# Altium PCB 下.PCBDOC
Units mm, origin at the board's own origin, x right, y up, seen from the top; angles counter-clockwise.
Board outline 146 x 45 mm, 2 copper layers (Top Layer, Bottom Layer); 4 components, 41 nets, 122 pads, 0 vias.
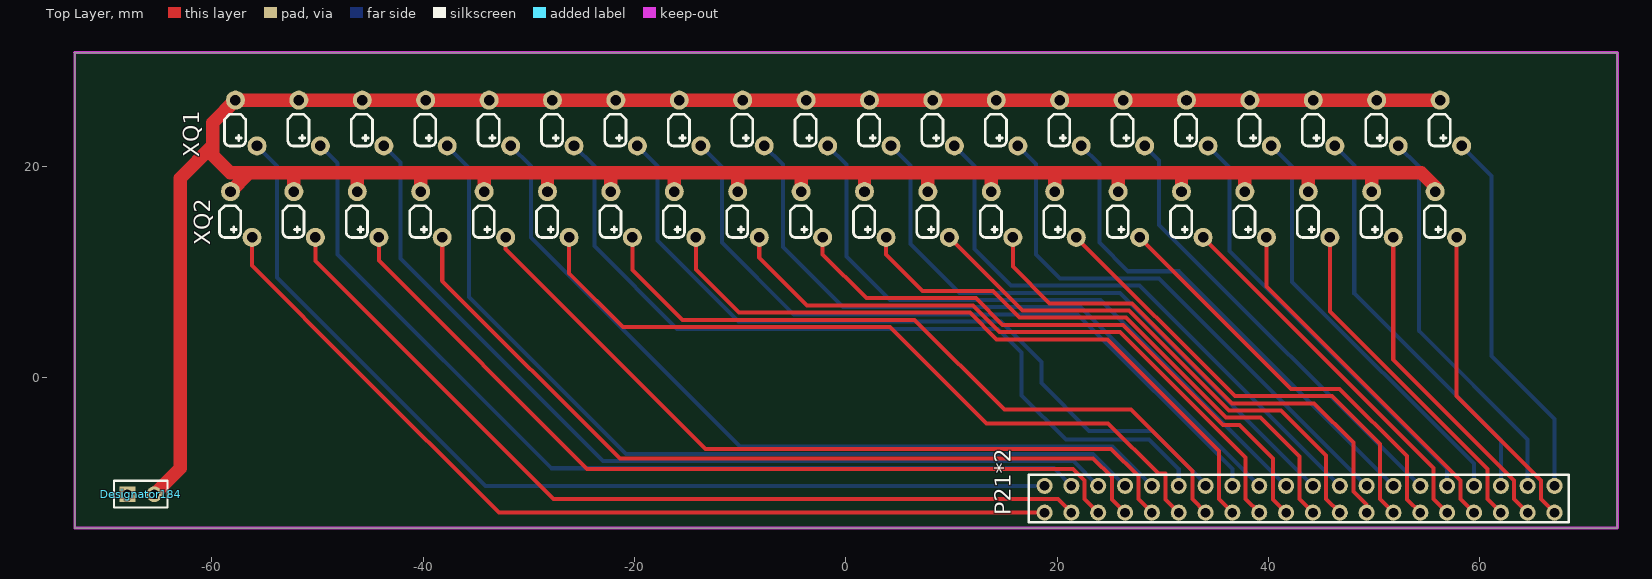
[diagram p0: Top Layer view]
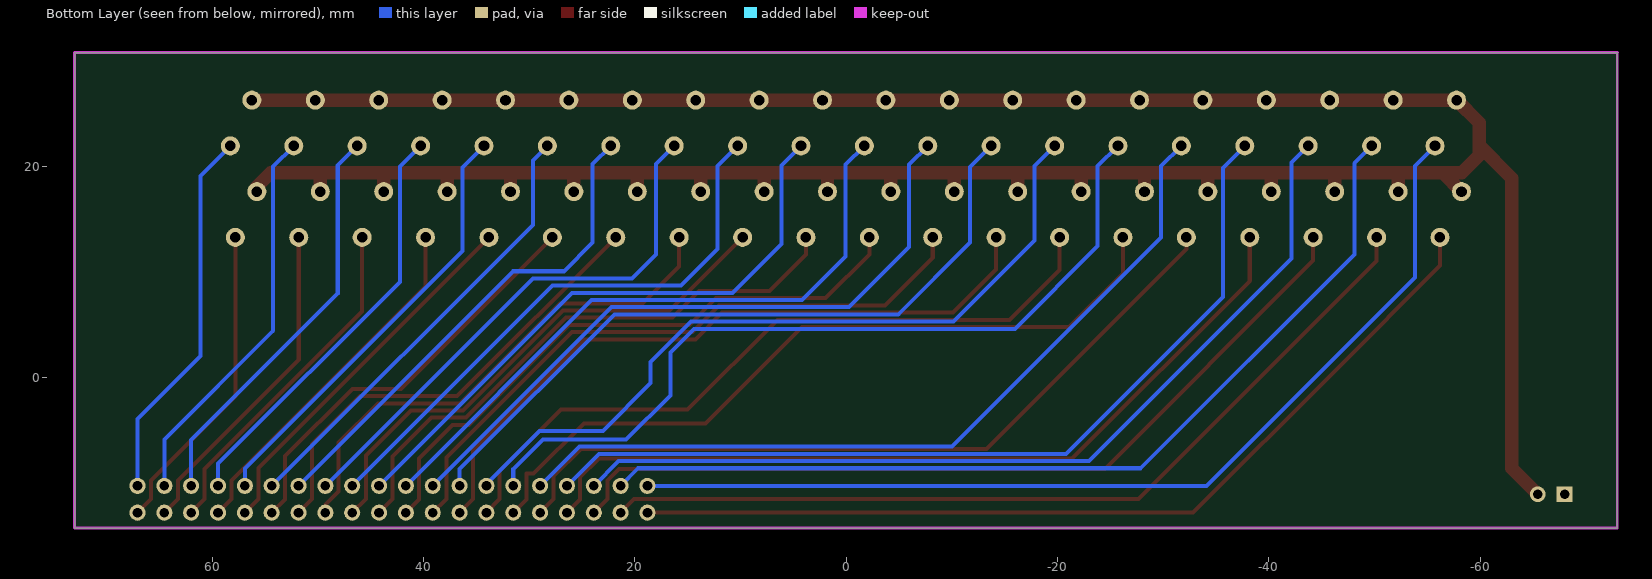
[diagram p1: Bottom Layer view, seen from below]

## Layer stack, top to bottom
Top Layer: signal copper 0.0356
Dielectric: dielectric 0.32, FR-4, Dk 4.8
Bottom Layer: signal copper 0.0356

## Board outline
-72.979,-14.2 73.022,-14.2 73.022,30.8 -72.978,30.8 -72.979,30.799

## Design rules (kind name [scope] priority, off if disabled: settings)
Clearance [All] p1: gap=0.3
FabricationTestPointUsage TestPointUsage [All] p1: valid=0 allowmultiple=FALSE
FabricationTestpoint Testpoint [All] p1: side=3 testpointundercomponent=TRUE minsize=1.016 maxsize=2.54 preferedsize=1.524 minholesize=0 maxholesize=1.016 preferedholesize=0.813 testpointgrid=0.025 allowsidetop=TRUE allowsidebottom=TRUE usegrid=TRUE gridtolerance=0
PolygonConnect [All] p1: connectstyle=Relief reliefconductorwidth=0.254 reliefentries=4 polygonreliefangle="90 Angle" airgapwidth=0.254
RoutingVias [All] p1: holewidth=0.8 width=1.6 viastyle="Through Hole" minholewidth=0.711 minwidth=1.27 maxholewidth=0.711 maxwidth=1.27
SilkToSolderMaskClearance SilkscreenOverComponentPads [IsPad] p1: minsilkscreentomaskgap=0.254 clearancetoexposedcopper=TRUE
SolderMaskExpansion [All] p1: expansion=0.102
Width Width_1 [All] p1: maxlimit=1.27 minlimit=0.254 preferedwidth=0.381 minimp=50.000000 maximp=50.000000 favimp=50.000000
Width [InNet('GND')] p2: maxlimit=1.27 minlimit=0.254 preferedwidth=0.381
25 further rules are at their usual default settings.

## Components (designator, comment, footprint, x,y, rotation, side; value= is the part's Value field where it differs from the comment)
Designator184 "" HDR1X2 -68,-11 r0 top
P21*2 "Header 21X2" XinPian 18.8,-12.751 r180 top
XQ1 "Header 20X2" XIANQUAN1 58.272,21.96 r180 top
XQ2 "Header 20X2" XIANQUAN1 57.8,13.3 r180 top

## Footprints (in the part's own frame and the unit in brackets; to place one, negate y for a bottom-side part, rotate by r counter-clockwise, add the part's x,y. Pads: shape width x height; smd on the part's side, far side on the other; paste and mask are expansions set on the pad)
HDR1X2 [mm] "Connector; Header; 2 Position"
  rect 1.5x1.5 hole 0.9: 1(0,0)
  round 1.5 hole 0.9: 2(2.54,0)
  silkscreen extent -1.27,-1.27 3.81,1.27
XIANQUAN1 [mm]
  round 1.8 hole 1: 1(2.04,-4.34) 2(0,0) 3(8.04,-4.34) 4(6,0) 5(14.04,-4.34) 6(12,0) 7(20.04,-4.34) 8(18,0) 9(26.04,-4.34) 10(24,0) 11(32.04,-4.34) 12(30,0) 13(38.04,-4.34) 14(36,0) 15(44.04,-4.34) 16(42,0) 17(50.04,-4.34) 18(48,0) 19(56.04,-4.34) 20(54,0) 21(62.04,-4.34) 22(60,0) 23(68.04,-4.34) 24(66,0) 25(74.04,-4.34) 26(72,0) 27(80.04,-4.34) 28(78,0) 29(86.04,-4.34) 30(84,0) 31(92.04,-4.34) 32(90,0) 33(98.04,-4.34) 34(96,0) 35(104.04,-4.34) 36(102,0) 37(110.04,-4.34) 38(108,0) 39(116.04,-4.34) 40(114,0)
  silkscreen extent 1.08,-3 117.08,0
XinPian [mil]
  round 60 hole 36: 1(0,-100) 2(-100,-100) 3(-200,-100) 4(-300,-100) 5(-400,-100) 6(-500,-100) 7(-600,-100) 8(-700,-100) 9(-800,-100) 10(-900,-100) 11(-1000,-100) 12(-1100,-100) 13(-1200,-100) 14(-1300,-100) 15(-1400,-100) 16(-1500,-100) 17(-1600,-100) 18(-1700,-100) 19(-1800,-100) 20(-1900,-100) 21(-1900,0) 22(-1800,0) 23(-1700,0) 24(-1600,0) 25(-1500,0) 26(-1400,0) 27(-1300,0) 28(-1200,0) 29(-1100,0) 30(-1000,0) 31(-900,0) 32(-800,0) 33(-700,0) 34(-600,0) 35(-500,0) 36(-400,0) 37(-300,0) 38(-200,0) 39(-100,0) 40(0,0)
  silkscreen extent -1953,-142 59,35

## Part data
P21*2: library part "Header 22X2", "Header, 22-Pin, Dual row"
XQ1 XQ2: "Header, 20-Pin, Dual row"

## Nets (pads, with @x,y where several pads share a name; then routed paths per layer and width w, separated by ;. In a path a pad name is that pad's centre, name@x,y a point inside that pad or via, vN(x,y) a via of type N, cw(c..) or ccw(c..) an arc to the next point about the centre after c; other vN are vias at no path point)
GND: Designator184.2 XQ1.1 XQ1.3 XQ1.5 XQ1.7 XQ1.9 XQ1.11 XQ1.13 XQ1.15 XQ1.17 XQ1.19 XQ1.21 XQ1.23 XQ1.25 XQ1.27 XQ1.29 XQ1.31 XQ1.33 XQ1.35 XQ1.37 XQ1.39 XQ2.1 XQ2.3 XQ2.5 XQ2.7 XQ2.9 XQ2.11 XQ2.13 XQ2.15 XQ2.17 XQ2.19 XQ2.21 XQ2.23 XQ2.25 XQ2.27 XQ2.29 XQ2.31 XQ2.33 XQ2.35 XQ2.37 XQ2.39 | length 307.8
  Top Layer w1.27: Designator184.2 -63,-8.54 -63,18.91 -59.91,22 ; XQ2.39 -56.47,19.41 ; XQ2.37 -52.24,19.37 -52.2,19.41 ; XQ2.35 -46.24,19.35 -46.18,19.41 ; XQ2.33 -40.24,19.32 -40.15,19.41 ; XQ2.31 -34.24,19.37 -34.2,19.41 ; XQ2.29 -28.24,19.35 -28.18,19.41 ; XQ2.27 -22.24,19.22 -22.05,19.41 ; XQ2.25 -16.24,19.25 -16.08,19.41 ; XQ2.23 -10.24,19.41 ; XQ2.21 -4.24,19.4 ; XQ2.19 1.76,19.4 ; XQ2.17 7.76,19.27 7.9,19.41 ; XQ2.15 13.76,19.35 13.82,19.41 ; XQ2.13 19.76,19.22 19.95,19.41 ; XQ2.11 25.76,19.32 25.85,19.41 ; XQ2.9 31.76,19.17 32,19.41 ; XQ2.7 37.76,19.27 37.9,19.41 ; XQ2.5 43.76,19.37 43.8,19.41 ; XQ2.3 49.76,19.4 49.77,19.41 ; XQ2.1 55.76,18.09 54.44,19.41 -58.25,19.41 -59.91,21.07 -59.91,22 ; XQ1.1 XQ1.15 XQ1.23 XQ1.39 -59.91,24.159 -59.91,22
XQ1_1: P21*2.20 XQ1.2 | length 35.8
  Bottom Layer w0.381: XQ1.2 61.11,19.121 61.11,10.91 61.11,2.088 67.06,-3.861 P21*2.20
XQ1_2: P21*2.19 XQ1.4 | length 37.2
  Bottom Layer w0.381: XQ1.4 54.23,20.001 54.23,4.468 64.52,-5.821 P21*2.19
XQ1_3: P21*2.18 XQ1.6 | length 38.7
  Bottom Layer w0.381: XQ1.6 48.11,20.121 48.11,7.988 61.98,-5.881 P21*2.18
XQ1_4: P21*2.17 XQ1.8 | length 40.1
  Bottom Layer w0.381: XQ1.8 42.23,20.001 42.23,9.099 59.44,-8.111 P21*2.17
XQ1_5: P21*2.16 XQ1.10 | length 41.5
  Bottom Layer w0.381: XQ1.10 36.32,19.911 36.32,11.999 56.9,-8.581 P21*2.16
XQ1_6: P21*2.15 XQ1.12 | length 43
  Bottom Layer w0.381: XQ1.12 29.65,20.581 29.65,14.498 P21*2.15
XQ1_7: P21*2.14 XQ1.14 | length 49.2
  Bottom Layer w0.381: XQ1.14 23.98,20.251 23.98,15.699 ; 23.98,13.7 23.98,15.699 ; P21*2.14 31.51,10.099 26.7,10.099 23.98,12.818 23.98,15.699
XQ1_8: P21*2.13 XQ1.16 | length 51.3
  Bottom Layer w0.381: XQ1.16 18,20.231 18,11.698 20.281,9.418 29.651,9.418 P21*2.13
XQ1_9: P21*2.12 XQ1.18 | length 54.4
  Bottom Layer w0.381: XQ1.18 12.17,20.061 12.17,12.199 15.632,8.737 27.792,8.737 P21*2.12
XQ1_10: P21*2.11 XQ1.20 | length 57.6
  Bottom Layer w0.381: XQ1.20 6.12,20.111 6.12,12.678 10.743,8.056 25.933,8.056 P21*2.11
XQ1_11: P21*2.10 XQ1.22 | length 61.8
  Bottom Layer w0.381: XQ1.22 0.04,20.191 0.04,11.499 4.164,7.375 24.074,7.375 P21*2.10
XQ1_12: P21*2.9 XQ1.24 | length 64.7
  Bottom Layer w0.381: XQ1.24 -5.96,20.191 -5.96,12.399 -0.255,6.694 22.215,6.694 P21*2.9
XQ1_13: P21*2.8 XQ1.26 | length 68.7
  Bottom Layer w0.381: XQ1.26 -11.72,19.951 -11.72,12.799 -4.934,6.013 21.933,6.013 36.58,-8.634 P21*2.8
XQ1_14: P21*2.7 XQ1.28 | length 72.5
  Bottom Layer w0.381: XQ1.28 -17.84,20.071 -17.84,12.999 -10.173,5.332 14.668,5.332 18.497,1.503 18.497,-0.497 23,-5 29,-5 34.04,-10.04 P21*2.7
XQ1_15: P21*2.6 XQ1.30 | length 78.3
  Bottom Layer w0.381: XQ1.30 -23.81,20.041 -23.81,12.499 -15.962,4.651 14.386,4.651 16.638,2.399 16.638,-1.638 20.82,-5.82 28.686,-5.82 31.5,-8.634 P21*2.6
XQ1_16: P21*2.5 XQ1.32 | length 78
  Bottom Layer w0.381: XQ1.32 -29.82,20.051 -29.82,13.299 -10.02,-6.501 25.25,-6.501 P21*2.5
XQ1_17: P21*2.4 XQ1.34 | length 84.6
  Bottom Layer w0.381: XQ1.34 -35.66,19.891 -35.66,7.66 -20.818,-7.182 23.391,-7.182 P21*2.4
XQ1_18: P21*2.3 XQ1.36 | length 86.3
  Bottom Layer w0.381: XQ1.36 -42.16,20.391 -42.16,11.299 -22.998,-7.863 21.532,-7.863 P21*2.3
XQ1_19: P21*2.2 XQ1.38 | length 89.4
  Bottom Layer w0.381: XQ1.38 -48.09,20.321 -48.09,11.699 -27.847,-8.544 19.673,-8.544 P21*2.2
XQ1_20: P21*2.1 XQ1.40 | length 94
  Bottom Layer w0.381: XQ1.40 -53.85,20.081 -53.85,9.52 -34.118,-10.211 P21*2.1
XQ2_1: P21*2.21 XQ2.2 | length 29.9
  Top Layer w0.381: XQ2.2 57.8,-1.72 65.773,-9.692 65.773,-11.464 P21*2.21
XQ2_2: P21*2.22 XQ2.4 | length 31.3
  Top Layer w0.381: XQ2.4 51.8,1.74 63.233,-9.692 63.233,-11.464 P21*2.22
XQ2_3: P21*2.23 XQ2.6 | length 32.8
  Top Layer w0.381: XQ2.6 45.8,6.299 60.728,-8.628 60.728,-11.464 61.98,-12.716 P21*2.23
XQ2_4: P21*2.24 XQ2.8 | length 34.2
  Top Layer w0.381: XQ2.8 39.8,8.66 58.153,-9.692 58.153,-11.464 P21*2.24
XQ2_5: P21*2.25 XQ2.10 | length 35.6
  Top Layer w0.381: XQ2.10 55.613,-8.512 55.613,-11.464 P21*2.25
XQ2_6: P21*2.26 XQ2.12 | length 39.7
  Top Layer w0.381: XQ2.12 42.132,-1.032 46.731,-1.032 53.1,-7.401 53.1,-11.491 P21*2.26
XQ2_7: P21*2.27 XQ2.14 | length 43.9
  Top Layer w0.381: XQ2.14 36.813,-1.713 46.012,-1.713 50.533,-6.234 50.533,-11.464 P21*2.27
XQ2_8: P21*2.28 XQ2.16 | length 49
  Top Layer w0.381: XQ2.16 15.8,10.55 19.285,7.066 27.071,7.066 36.531,-2.394 44.3,-2.394 48.028,-6.121 48.028,-10.73 49.28,-11.982 P21*2.28
XQ2_9: P21*2.29 XQ2.18 | length 50.1
  Top Layer w0.381: XQ2.18 16.716,6.385 26.789,6.385 36.249,-3.075 41.174,-3.075 45.453,-7.354 45.453,-11.464 P21*2.29
XQ2_10: P21*2.30 XQ2.20 | length 54.5
  Top Layer w0.381: XQ2.20 3.8,11.701 7.272,8.229 13.908,8.229 16.433,5.704 26.507,5.704 35.967,-3.756 39.255,-3.756 42.913,-7.414 42.913,-11.464 P21*2.30
XQ2_11: P21*2.31 XQ2.22 | length 57.9
  Top Layer w0.381: XQ2.22 -2.2,11.701 1.953,7.548 12.314,7.548 14.839,5.023 26.225,5.023 35.685,-4.437 37.236,-4.437 40.4,-7.601 40.4,-11.491 P21*2.31
XQ2_12: P21*2.32 XQ2.24 | length 61.5
  Top Layer w0.381: XQ2.24 -8.2,11.401 -3.666,6.867 12.032,6.867 14.557,4.342 25.943,4.342 37.833,-7.548 37.833,-11.464 P21*2.32
XQ2_13: P21*2.33 XQ2.26 | length 66
  Top Layer w0.381: XQ2.26 -14.2,10.25 -10.136,6.186 11.75,6.186 14.275,3.661 24.738,3.661 35.328,-6.929 35.328,-11.464 36.58,-12.716 P21*2.33
XQ2_14: P21*2.34 XQ2.28 | length 68.4
  Top Layer w0.381: XQ2.28 -20.2,10.24 -15.747,5.787 -15.465,5.505 6.495,5.505 15,-3 27,-3 32.788,-8.788 32.788,-11.464 34.04,-12.716 P21*2.34
XQ2_15: P21*2.35 XQ2.30 | length 71.9
  Top Layer w0.381: XQ2.30 -26.2,9.91 -21.114,4.824 4.176,4.824 13.289,-4.289 24.809,-4.289 29.569,-9.049 30.248,-9.049 30.248,-11.499 P21*2.35
XQ2_16: P21*2.36 XQ2.32 | length 73.9
  Top Layer w0.381: XQ2.32 -32.2,12.2 -13.299,-6.701 25.1,-6.701 27.673,-9.274 27.673,-11.464 P21*2.36
XQ2_17: P21*2.37 XQ2.34 | length 79.1
  Top Layer w0.381: XQ2.34 -38.2,9.2 -21.399,-7.601 23.4,-7.601 25.168,-9.369 25.168,-11.499 P21*2.37
XQ2_18: P21*2.38 XQ2.36 | length 81.2
  Top Layer w0.381: XQ2.36 -44.2,11.12 -24.478,-8.601 21.501,-8.601 22.593,-9.692 22.593,-11.464 P21*2.38
XQ2_19: P21*2.39 XQ2.38 | length 83.6
  Top Layer w0.381: XQ2.38 -50.2,11.05 -27.686,-11.464 20.053,-11.464 P21*2.39
XQ2_20: P21*2.40 XQ2.40 | length 87.4
  Top Layer w0.381: XQ2.40 -56.2,10.63 -46.296,0.726 -32.818,-12.751 P21*2.40
pads on no net: Designator184.1

## Keep-outs
Keep-Out Layer:
  lines w0.254: -73,30.799 -72.999,30.8 ; -72.979,30.799 -72.979,-14.2 73.022,-14.2 73.022,30.8
  lines w0.3: -72.978,30.8 73.022,30.8

## Silkscreen, mask and mechanical layers (free items; w line width, h text height)
Mechanical 1:
  circle w0.254: c-55.749,17.29 r0.5
  circle w0.254: c-49.749,17.29 r0.5
  circle w0.254: c-52.249,22.29 r0.5
  circle w0.254: c-43.749,17.29 r0.5
  circle w0.254: c-46.249,22.29 r0.5
  circle w0.254: c-37.749,17.29 r0.5
  circle w0.254: c-40.249,22.29 r0.5
  circle w0.254: c-31.749,17.29 r0.5
  circle w0.254: c-34.249,22.29 r0.5
  circle w0.254: c-25.749,17.29 r0.5
  circle w0.254: c-28.249,22.29 r0.5
  circle w0.254: c-19.749,17.29 r0.5
  circle w0.254: c-22.249,22.29 r0.5
  circle w0.254: c-13.749,17.29 r0.5
  circle w0.254: c-16.249,22.29 r0.5
  circle w0.254: c-7.749,17.29 r0.5
  circle w0.254: c-10.249,22.29 r0.5
  circle w0.254: c58.251,17.29 r0.5
  circle w0.254: c55.751,22.29 r0.5
  circle w0.254: c52.251,17.29 r0.5
  circle w0.254: c49.751,22.29 r0.5
  circle w0.254: c46.251,17.29 r0.5
  circle w0.254: c43.751,22.29 r0.5
  circle w0.254: c40.251,17.29 r0.5
  circle w0.254: c37.751,22.29 r0.5
  circle w0.254: c34.251,17.29 r0.5
  circle w0.254: c31.751,22.29 r0.5
  circle w0.254: c28.251,17.29 r0.5
  circle w0.254: c25.751,22.29 r0.5
  circle w0.254: c22.251,17.29 r0.5
  circle w0.254: c19.751,22.29 r0.5
  circle w0.254: c16.251,17.29 r0.5
  circle w0.254: c13.751,22.29 r0.5
  circle w0.254: c10.251,17.29 r0.5
  circle w0.254: c7.751,22.29 r0.5
  circle w0.254: c4.251,17.29 r0.5
  circle w0.254: c1.751,22.29 r0.5
  circle w0.254: c-4.249,22.29 r0.5
  circle w0.254: c-1.749,17.29 r0.5
  circle w0.254: c-58.249,22.29 r0.5
  circle w0.254: c-67.478,25.29 r1.5
  circle w0.254: c-67.478,19.8 r1.5
  circle w0.254: c-67.478,14.29 r1.5
  circle w0.254: c67.522,14.29 r1.5
  circle w0.254: c67.522,19.8 r1.5
  circle w0.254: c67.522,25.29 r1.5
  circle w0.254: c-24,0 r1.5
  circle w0.254: c24,0 r1.5